# EAGLE board PROCESSING UNIT (EAGLE 9.5.0)
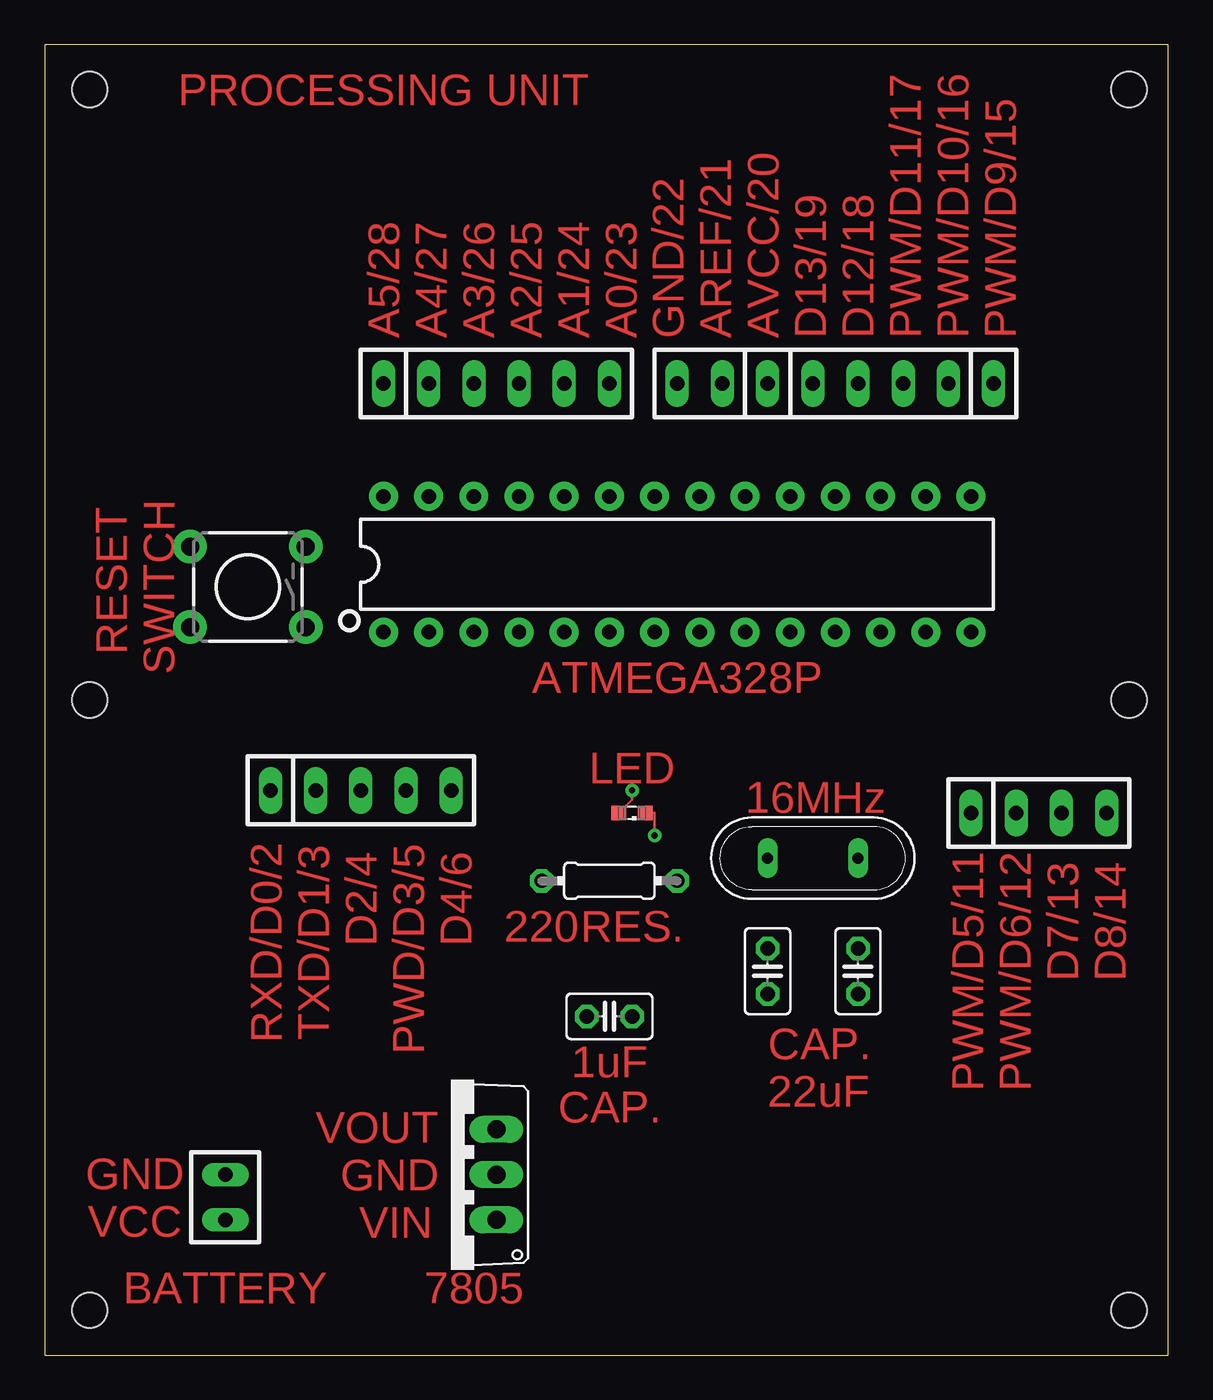
[diagram p0: board, top side]
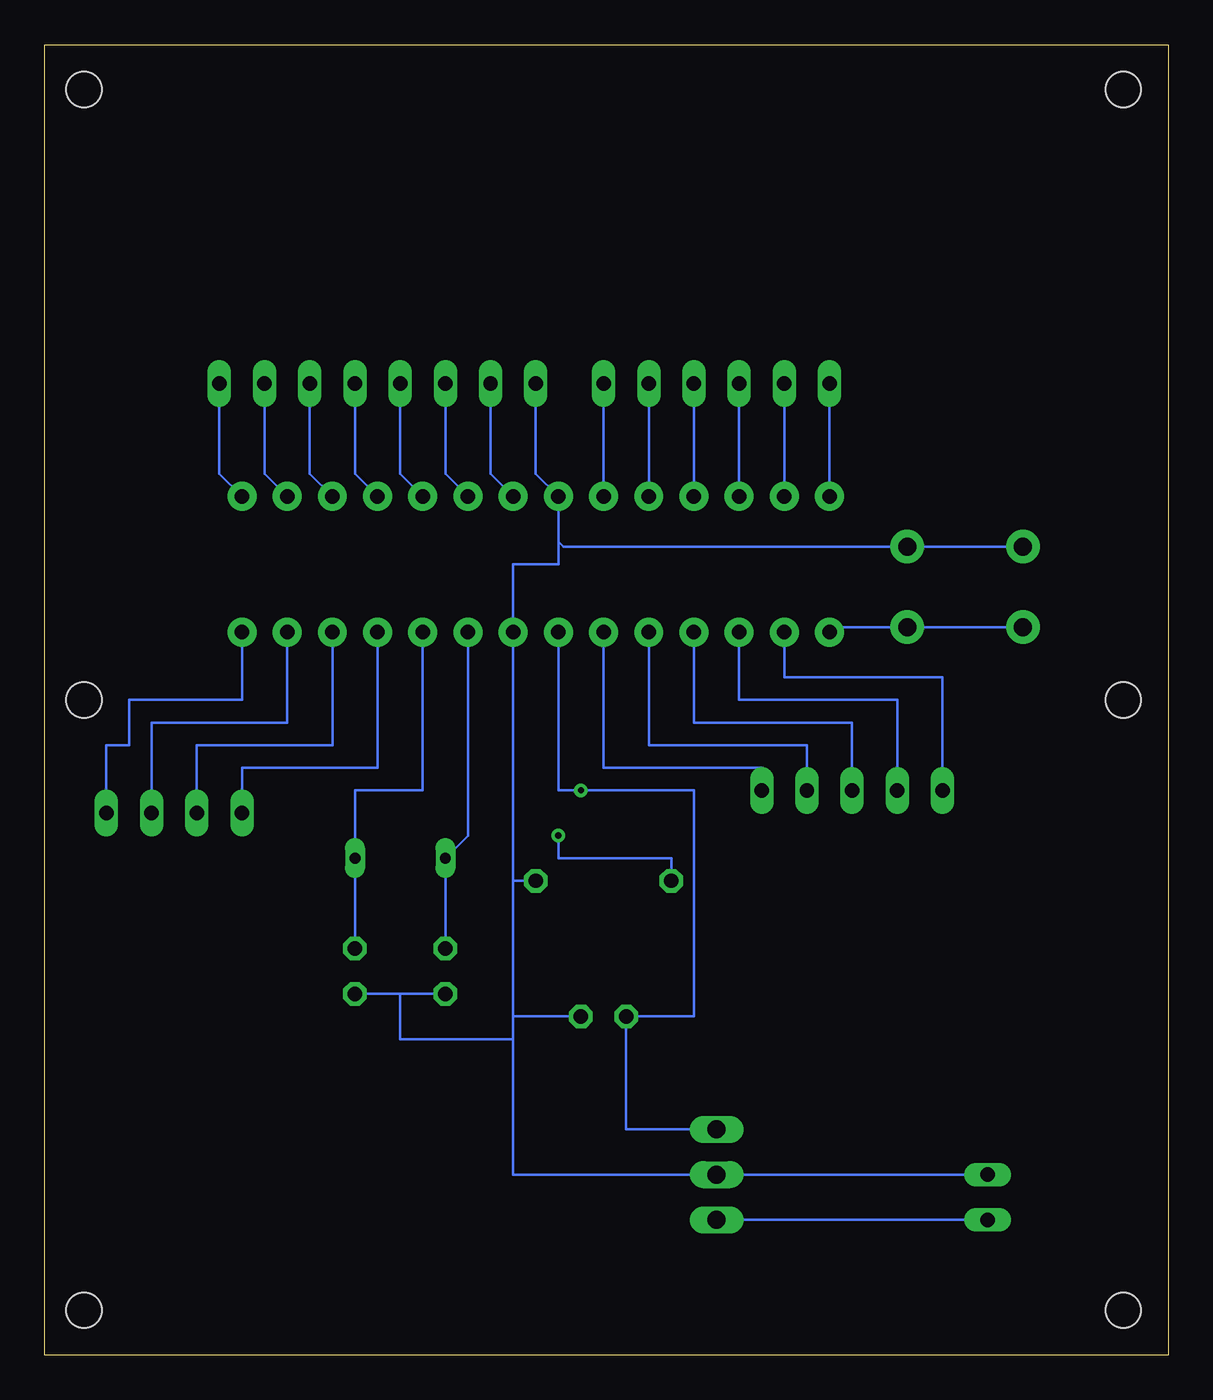
[diagram p1: board, bottom side, seen from below]

Size 63.17 x 73.65 mm. Coordinates in mm from the lower left corner, seen from the top.
Outline: 0,0 63.17,0 63.17,73.65 0,73.65 0,0
Copper layers (1*16): Top 0.035mm / dielectric 1.5mm / Bottom 0.035mm
Design rules "default": minimum track width 6mil, minimum drill 0.35mm, track to track 6mil, track to pad 6mil, pad to pad 6mil, via to via 6mil, smd to smd 6mil, copper to edge 40mil, drill to drill 6mil, minimum pad ring 10mil, minimum via ring 8mil, stop-mask expansion 4mil, vias tented up to drill 0mil, thermal gap 10mil
Holes 2 mm at 2.54,2.54 60.96,2.54 60.96,71.12 2.54,71.12 2.54,36.83 60.96,36.83

## Footprints (pad centres in the part's own frame; a part is rotated, then mirrored left to right if it is on the bottom)
TO220V = drill 1.016 long: 1 -2.54,-2.54; 2 0,-2.54; 3 2.54,-2.54
C025-025X050 = drill 0.813 octagon: 1 -1.27,0; 2 1.27,0
SIP-100-02-32Y = drill 0.813 long: 1 -1.27,0; 2 1.27,0
SIP-100-03-32Y = drill 0.813 long: 1 -2.54,0; 2 0,0; 3 2.54,0
SIP-100-05-32Y = drill 0.813 long: 1 -5.08,0; 2 -2.54,0; 3 0,0; 4 2.54,0; 5 5.08,0
SIP-100-04-32Y = drill 0.813 long: 1 -3.81,0; 2 -1.27,0; 3 1.27,0; 4 3.81,0
SIP-100-06-32Y = drill 0.813 long: 1 -6.35,0; 2 -3.81,0; 3 -1.27,0; 4 1.27,0; 5 3.81,0; 6 6.35,0
SML0603 = smd 0.8 x 0.8: A 0.75,0; C -0.75,0
QS = drill 0.61 long: 1 -2.54,0; 2 2.54,0
0204/7 = drill 0.813 octagon: 1 -3.81,0; 2 3.81,0
TACTILE-PTH = drill 1.016 pad 1.88: 1 -3.251,2.261; 2 3.251,2.261; 3 -3.251,-2.261; 4 3.251,-2.261
DIP28 = drill 0.813 pad 1.626: 1 -16.51,-3.81; 2 -13.97,-3.81; 3 -11.43,-3.81; 4 -8.89,-3.81; 5 -6.35,-3.81; 6 -3.81,-3.81; 7 -1.27,-3.81; 8 1.27,-3.81; 9 3.81,-3.81; 10 6.35,-3.81; 11 8.89,-3.81; 12 11.43,-3.81; 13 13.97,-3.81; 14 16.51,-3.81; 15 16.51,3.81; 16 13.97,3.81; 17 11.43,3.81; 18 8.89,3.81; 19 6.35,3.81; 20 3.81,3.81; 21 1.27,3.81; 22 -1.27,3.81; 23 -3.81,3.81; 24 -6.35,3.81; 25 -8.89,3.81; 26 -11.43,3.81; 27 -13.97,3.81; 28 -16.51,3.81

## Placement (x,y rotation side)
7805  7805TV  [TO220V]  22.86,10.16 90 top
C1  [C025-025X050]  31.75,19.05 0 top
C2  22pf  [C025-025X050]  40.64,21.59 90 top
C3  22pf  [C025-025X050]  45.72,21.59 90 top
J1  F-1X02-SIP-100-32Y  [SIP-100-02-32Y]  10.16,8.89 90 top
J2  F-1X03-SIP-100-32Y  [SIP-100-03-32Y]  38.1,54.61 180 top
J3  F-1X05-SIP-100-32Y  [SIP-100-05-32Y]  17.78,31.75 0 top
J4  F-1X04-SIP-100-32Y  [SIP-100-04-32Y]  55.88,30.48 0 top
J5  F-1X05-SIP-100-32Y  [SIP-100-05-32Y]  48.26,54.61 180 top
J6  F-1X06-SIP-100-32Y  [SIP-100-06-32Y]  25.4,54.61 0 top
LED1  GREEN LED  [SML0603]  33.02,30.48 180 top
Q1  [QS]  43.18,27.94 180 top
R1  220  [0204/7]  31.75,26.67 180 top
S1  [TACTILE-PTH]  11.43,43.18 180 top
U1  328P  [DIP28]  35.56,44.45 0 top

## Library data of the parts
7805 = linear
C1-C3 = rcl; SPICEPREFIX: C
J1-J6 = con-headers-jp
LED1 = led
Q1 = special
R1 = rcl; SPICEPREFIX: R
S1 = SparkFun-Retired
U1 = SparkFun-IC-Microcontroller; PROD_ID: IC-09136

## Nets
N$1: 7805.2 C1.2 C2.1 C3.1 J1.2 J2.3 R1.1 S1.3 S1.4 U1.8 U1.22
N$2: S1.1 S1.2 U1.1
N$3: LED1.C R1.2
N$4: C2.2 Q1.2 U1.9
N$5: 7805.3 C1.1 LED1.A U1.7
N$6: 7805.1 J1.1
N$7: C3.2 Q1.1 U1.10
N$8: J2.1 U1.20
N$9: J2.2 U1.21
N$10: J3.1 U1.2
N$11: J3.2 U1.3
N$12: J3.3 U1.4
N$13: J3.4 U1.5
N$14: J3.5 U1.6
N$15: J4.1 U1.11
N$16: J4.2 U1.12
N$17: J4.3 U1.13
N$18: J4.4 U1.14
N$19: J5.1 U1.15
N$20: J5.2 U1.16
N$21: J5.3 U1.17
N$22: J5.4 U1.18
N$23: J5.5 U1.19
N$24: J6.1 U1.28
N$25: J6.2 U1.27
N$26: J6.3 U1.26
N$27: J6.4 U1.25
N$28: J6.5 U1.24
N$29: J6.6 U1.23

## Tracks (layer width: path | path; a pad name or v marks a point on that pad's centre or on a via)
N$1
  Bottom 0.152: C3.1 43.18,20.32 | 43.18,20.32 C2.1 | 43.18,20.32 43.18,17.78 36.83,17.78 | 36.83,17.78 36.83,19.05 | 36.83,19.05 36.83,26.67 | 36.83,26.67 U1.8 36.83,44.45 34.29,44.45 34.29,45.72 | C1.2 36.83,19.05 | U1.22 34.29,46.99 | 36.83,17.78 36.83,10.16 7805.2 J1.2 | J2.3 35.56,49.53 U1.22 | S1.4 S1.3 34.01,45.44 34.29,45.72 | R1.1 36.83,26.67 | U1.22 34.29,45.72
N$2
  Bottom 0.152: U1.1 18.77,40.92 S1.1 S1.2
N$3  (via drill 0.35)
  Top 0.152: LED1.C 34.29,30.48 v34.29,29.21
  Bottom 0.152: R1.2 27.94,27.94 34.29,27.94 v34.29,29.21
N$4
  Bottom 0.152: U1.9 39.37,29.21 Q1.2 C2.2
N$5  (via drill 0.35)
  Top 0.152: v33.02,31.75 33.02,31.23 LED1.A
  Bottom 0.152: U1.7 34.29,31.75 v33.02,31.75 26.67,31.75 26.67,19.05 C1.1 30.48,12.7 7805.3
N$6
  Bottom 0.152: 7805.1 J1.1
N$7
  Bottom 0.152: U1.10 41.91,31.75 45.72,31.75 Q1.1 C3.2
N$8
  Bottom 0.152: J2.1 40.64,49.53 U1.20
N$9
  Bottom 0.152: J2.2 38.1,49.53 U1.21
N$10
  Bottom 0.152: J3.1 12.7,38.1 21.59,38.1 U1.2
N$11
  Bottom 0.152: J3.2 15.24,36.83 24.13,36.83 U1.3
N$12
  Bottom 0.152: J3.3 17.78,35.56 26.67,35.56 U1.4
N$13
  Bottom 0.152: J3.4 20.32,34.29 29.21,34.29 U1.5
N$14
  Bottom 0.152: U1.6 31.75,33.02 22.86,33.02 J3.5
N$15
  Bottom 0.152: U1.11 44.45,33.02 52.07,33.02 J4.1
N$16
  Bottom 0.152: U1.12 46.99,34.29 54.61,34.29 J4.2
N$17
  Bottom 0.152: U1.13 49.53,35.56 57.15,35.56 J4.3
N$18
  Bottom 0.152: U1.14 52.07,36.83 58.42,36.83 58.42,34.29 59.69,34.29 J4.4
N$19
  Bottom 0.152: J5.1 53.34,49.53 U1.15
N$20
  Bottom 0.152: J5.2 50.8,49.53 U1.16
N$21
  Bottom 0.152: J5.3 48.26,49.53 U1.17
N$22
  Bottom 0.152: J5.4 45.72,49.53 U1.18
N$23
  Bottom 0.152: J5.5 43.18,49.53 U1.19
N$24
  Bottom 0.152: J6.1 U1.28
N$25
  Bottom 0.152: J6.2 U1.27
N$26
  Bottom 0.152: J6.3 U1.26
N$27
  Bottom 0.152: J6.4 U1.25
N$28
  Bottom 0.152: J6.5 U1.24
N$29
  Bottom 0.152: J6.6 U1.23

## Text on the board
Top: PROCESSING UNIT | A5/28 / A4/27 / A3/26 / A2/25 / A1/24 / A0/23 / GND/22 / AREF/21 / AVCC/20 / D13/19 / D12/18 / PWM/D11/17 / PWM/D10/16 / PWM/D9/15 | RESET / SWITCH | ATMEGA328P | LED | 16MHz | 220 | RES. | RXD/D0/2 / TXD/D1/3 / D2/4 / PWD/D3/5 / D4/6 | PWM/D5/11 / PWM/D6/12 / D7/13 / D8/14 | 1uF | CAP. | CAP. / 22uF | VOUT / GND / VIN | GND / VCC | BATTERY | 7805